# Altium PCB PCB1.PcbDoc
Units mm, origin at the board's own origin, x right, y up, seen from the top; angles counter-clockwise.
Board outline 84 x 84 mm, 2 copper layers (Top Layer, Bottom Layer); 24 components, 1 nets, 129 pads, 0 vias.
Unrouted connection lines stored in the file: 2.
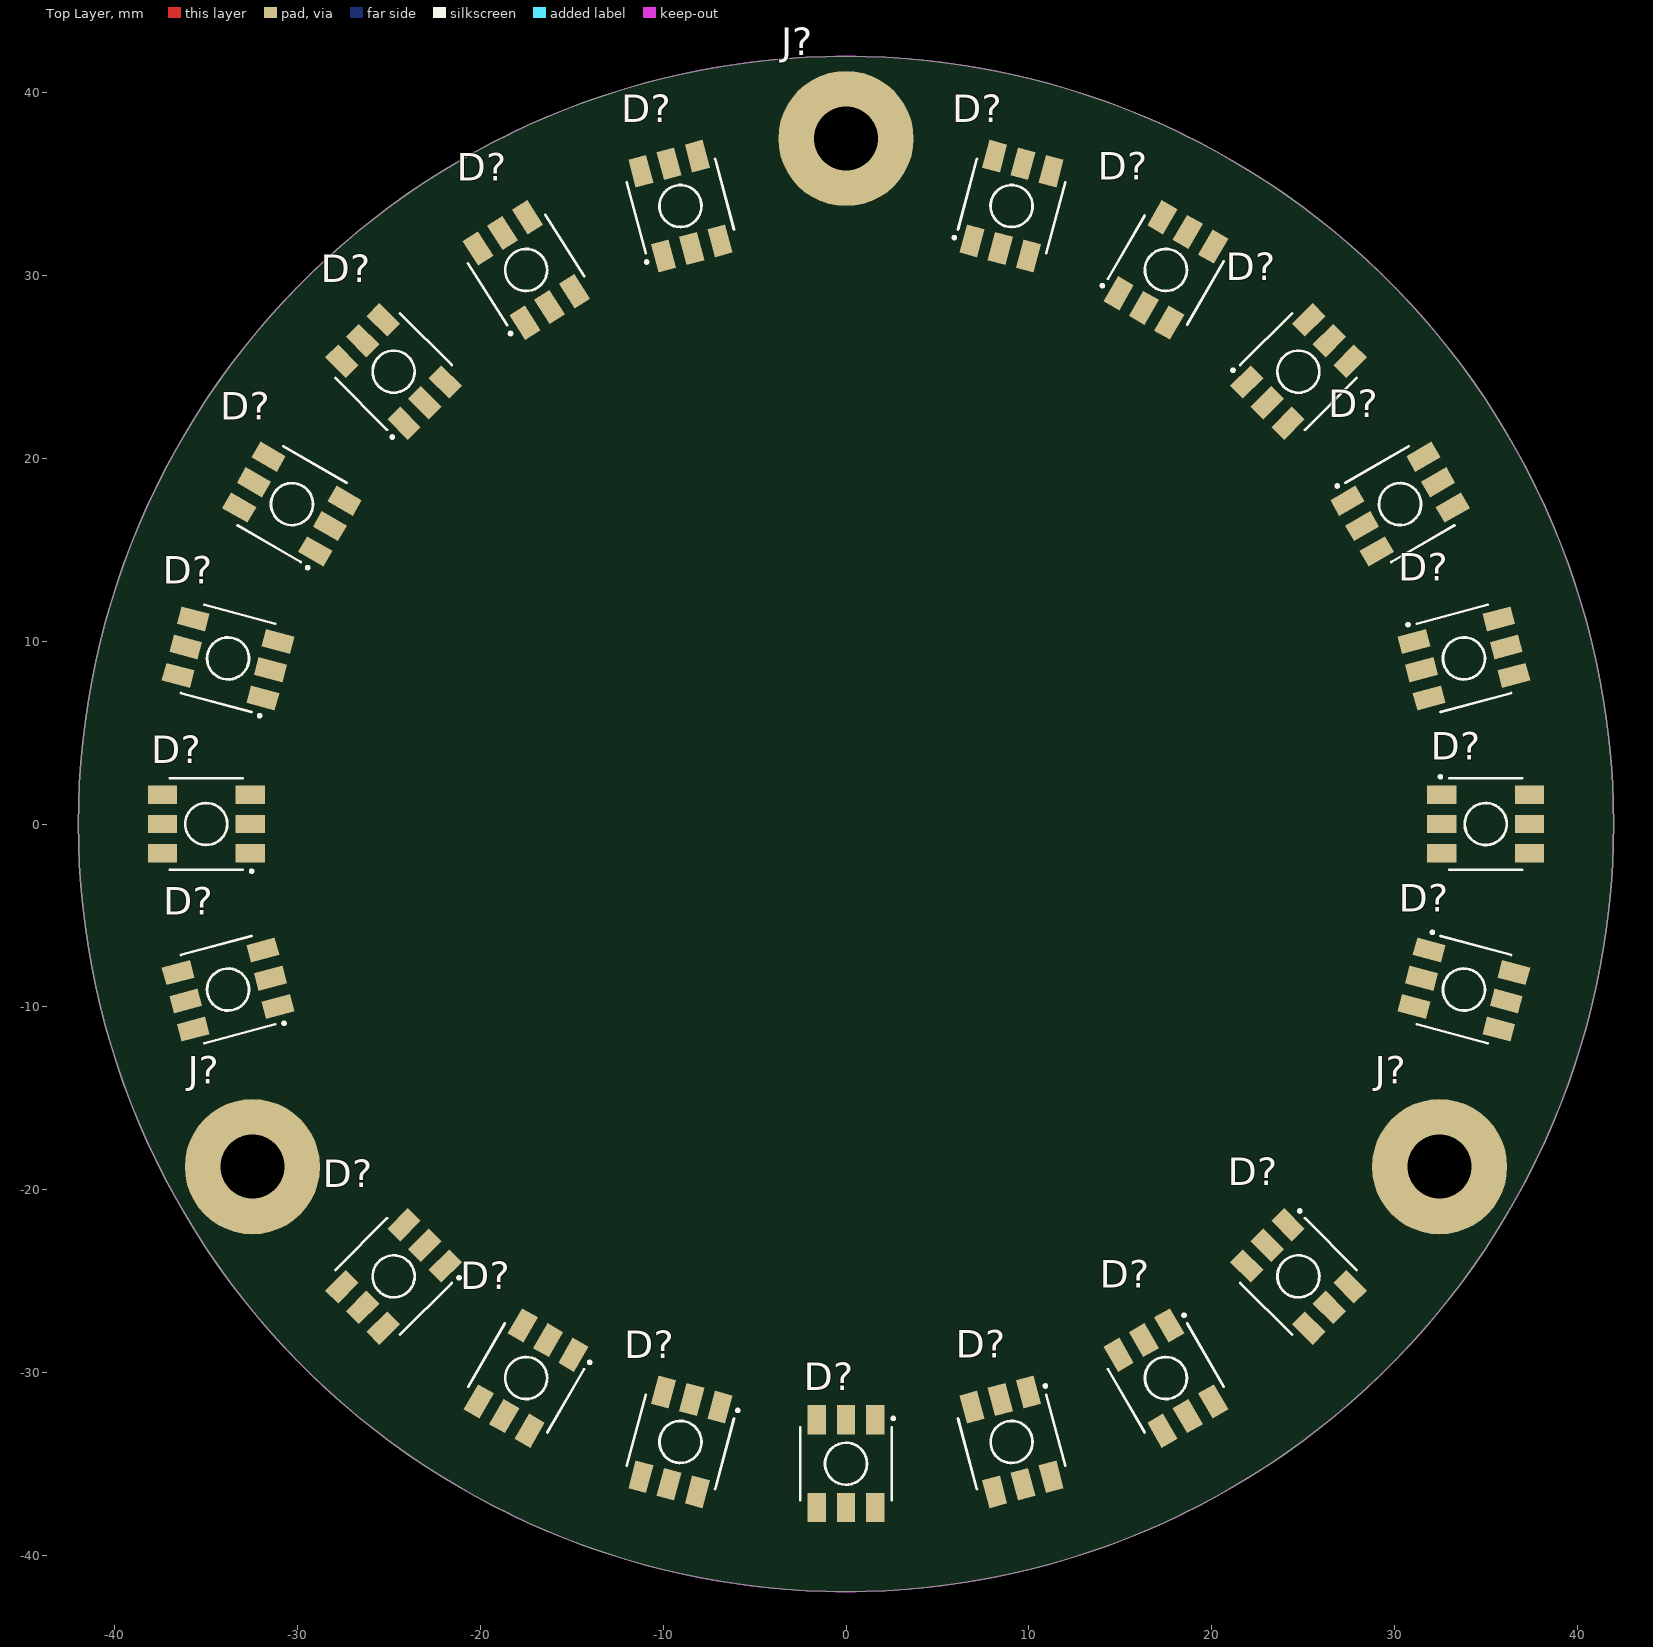
[diagram p0: Top Layer view]
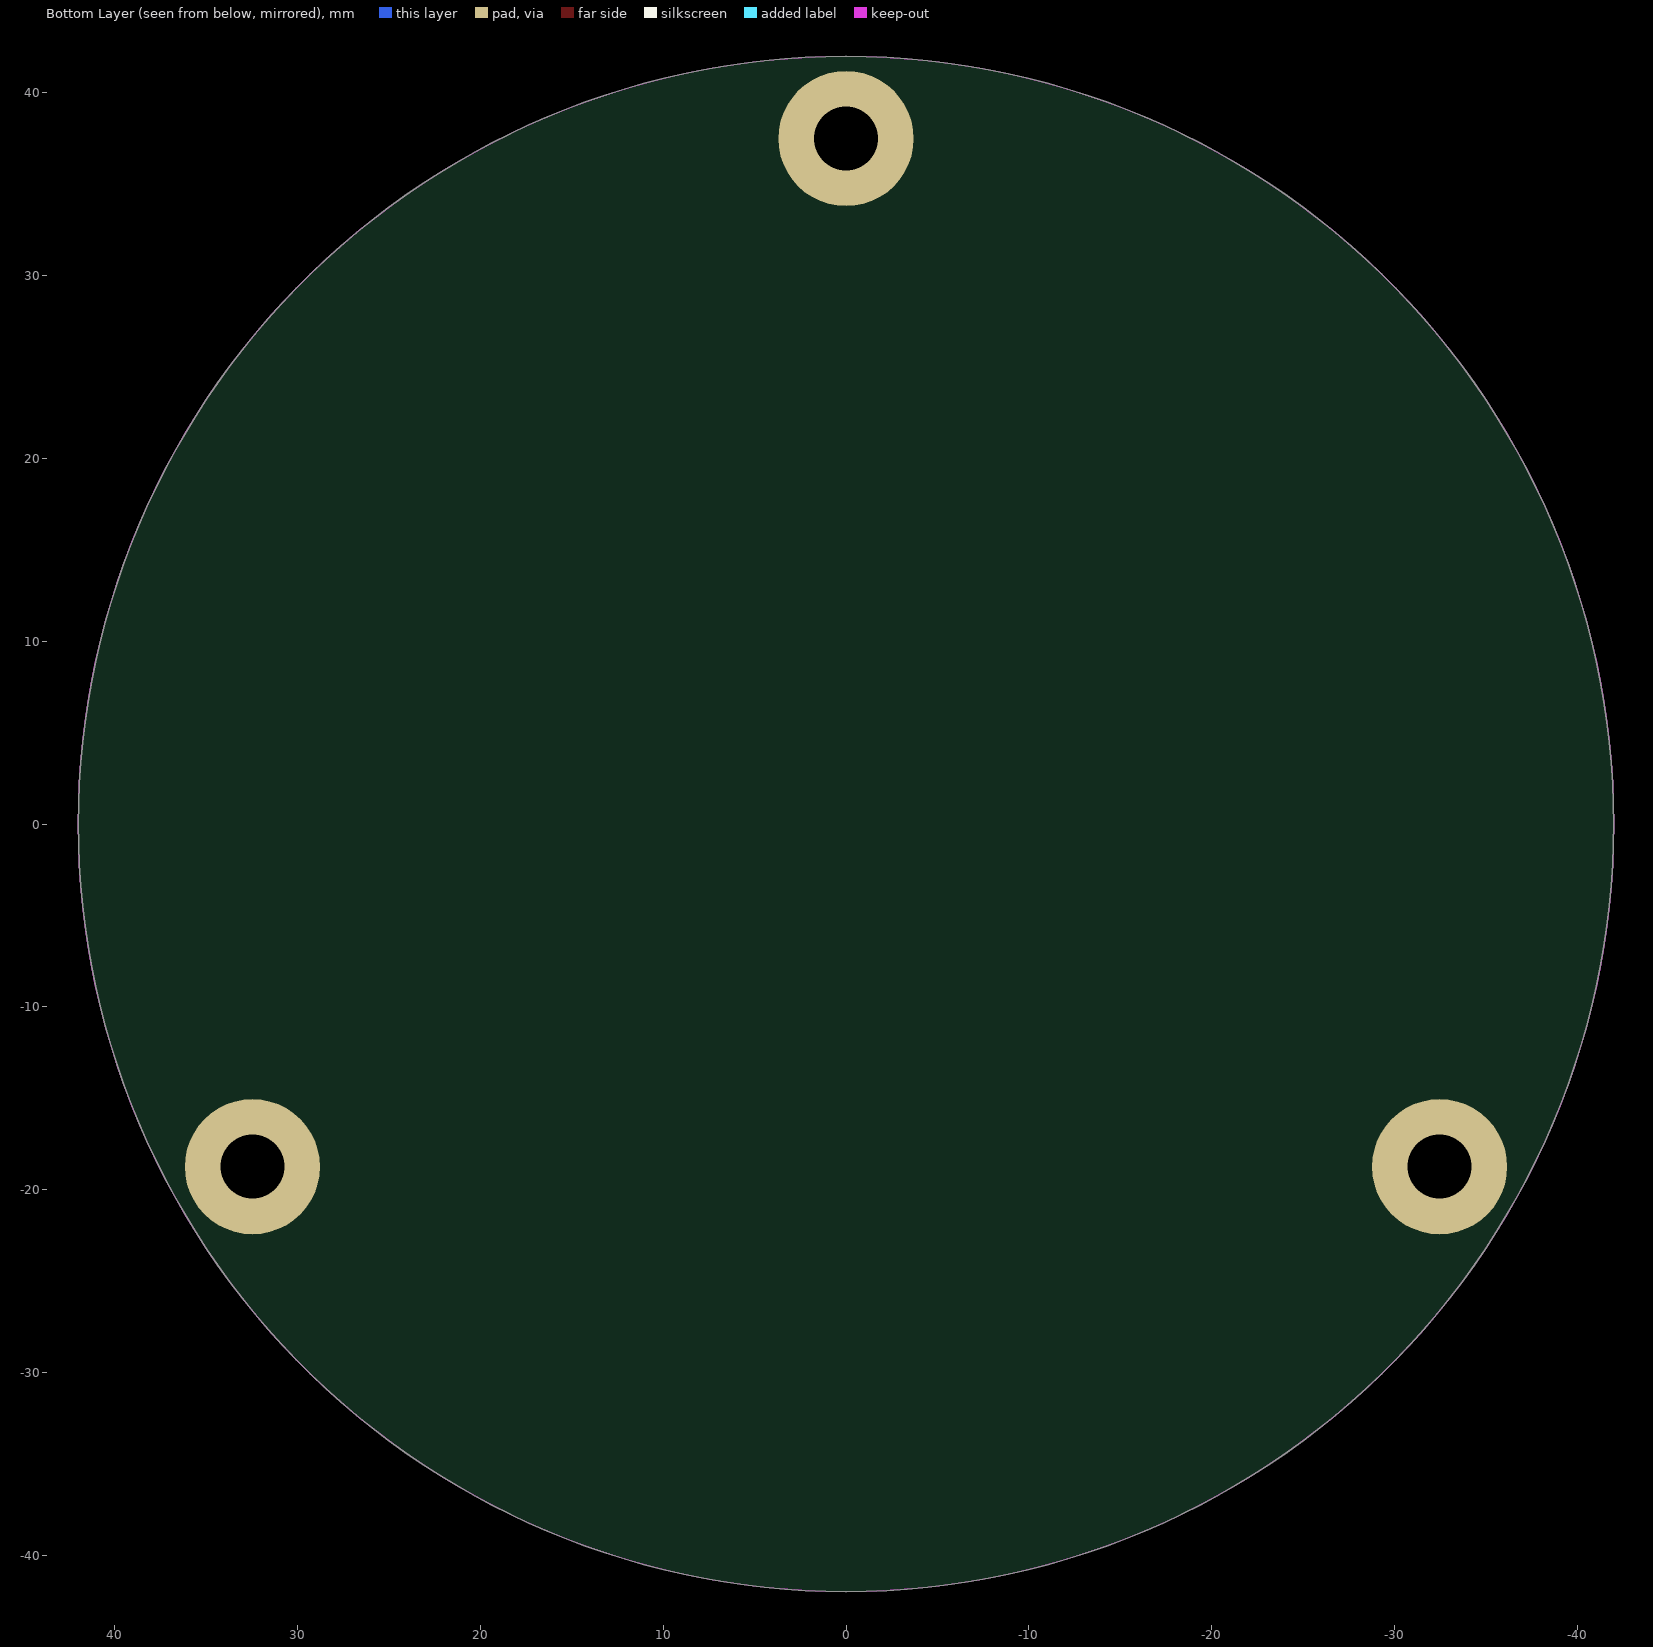
[diagram p1: Bottom Layer view, seen from below]

## Layer stack, top to bottom
Top Solder: solder mask 0.0102, Solder Resist, Dk 3.5
Top Layer: signal copper 0.0356
Dielectric 1: dielectric 0.32, FR-4, Dk 4.8
Bottom Layer: signal copper 0.0356
Bottom Solder: solder mask 0.0102, Solder Resist, Dk 3.5

## Board outline
-42,0 ccw(c0,0) 0,-42 ccw(c0,0) 42,0 ccw(c0,0) 0,42 ccw(c0,0)

## Design rules (kind name [scope] priority, off if disabled: settings)
Clearance [All] p1: gap=0.254 ignorepadtopadclearanceinfootprint=FALSE except(0: Arc-Hole Track-Hole SMDPad-Hole THPad-Hole Via-Hole Fill-Hole Poly-Hole Region-Hole Text-Hole)
PolygonConnect [All] p1: connectstyle=Relief reliefconductorwidth=0.254 reliefentries=4 polygonreliefangle="90 Angle" airgapwidth=0.254
RoutingVias [All] p1: holewidth=0.711 width=1.27 viastyle="Through Hole" minholewidth=0.711 minwidth=1.27 maxholewidth=0.711 maxwidth=1.27
SolderMaskExpansion [All] p1: expansion=0.102 istentingtop=FALSE
Width [All] p1: maxlimit=0.254 minlimit=0.254 preferedwidth=0.254
30 further rules are at their usual default settings.

## Classes and differential pairs
component class Sheet1: D? J?

## Components (designator, comment, footprint, x,y, rotation, side; value= is the part's Value field where it differs from the comment)
D? "MHP5050RGBDT" LED,RGB,SMD,5050 0,-35 r270 top
D? "MHP5050RGBDT" LED,RGB,SMD,5050 -9.059,33.807 r105 top
D? "MHP5050RGBDT" LED,RGB,SMD,5050 -17.5,-30.311 r240 top
D? "MHP5050RGBDT" LED,RGB,SMD,5050 9.059,33.807 r75 top
D? "MHP5050RGBDT" LED,RGB,SMD,5050 9.059,-33.807 r285 top
D? "MHP5050RGBDT" LED,RGB,SMD,5050 17.5,-30.311 r300 top
D? "MHP5050RGBDT" LED,RGB,SMD,5050 30.311,17.5 r30 top
D? "MHP5050RGBDT" LED,RGB,SMD,5050 -9.059,-33.807 r255 top
D? "MHP5050RGBDT" LED,RGB,SMD,5050 24.749,24.749 r45 top
D? "MHP5050RGBDT" LED,RGB,SMD,5050 17.5,30.311 r60 top
D? "MHP5050RGBDT" LED,RGB,SMD,5050 -24.749,24.749 r135 top
D? "MHP5050RGBDT" LED,RGB,SMD,5050 35,0 r0 top
D? "MHP5050RGBDT" LED,RGB,SMD,5050 24.749,-24.749 r315 top
D? "MHP5050RGBDT" LED,RGB,SMD,5050 -24.749,-24.749 r225 top
D? "MHP5050RGBDT" LED,RGB,SMD,5050 -35,0 r180 top
D? "MHP5050RGBDT" LED,RGB,SMD,5050 33.807,-9.059 r345 top
D? "MHP5050RGBDT" LED,RGB,SMD,5050 33.807,9.059 r15 top
D? "MHP5050RGBDT" LED,RGB,SMD,5050 -30.311,17.5 r150 top
D? "MHP5050RGBDT" LED,RGB,SMD,5050 -33.807,9.059 r165 top
D? "MHP5050RGBDT" LED,RGB,SMD,5050 -33.807,-9.059 r195 top
D? "MHP5050RGBDT" LED,RGB,SMD,5050 -17.5,30.311 r122.39 top
J? "Plated M3 hole" HOLE,M3,3mm,PLATED 32.476,-18.75 r0 top
J? "Plated M3 hole" HOLE,M3,3mm,PLATED -32.476,-18.75 r0 top
J? "Plated M3 hole" HOLE,M3,3mm,PLATED 0,37.5 r0 top

## Footprints (in the part's own frame and the unit in brackets; to place one, negate y for a bottom-side part, rotate by r counter-clockwise, add the part's x,y. Pads: shape width x height; smd on the part's side, far side on the other; paste and mask are expansions set on the pad)
HOLE,M3,3mm,PLATED [mm] "Plated M3 Bolt Hole"
  round 7.4 hole 3.5: 0(0,0)
LED,RGB,SMD,5050 [mm] "MeiHua MHP5050RGBDT"
  rect 1.6x1 smd mask+0.05: 1(-2.4,1.6) 2(2.4,1.6) 3(-2.4,0) 4(2.4,0) 5(-2.4,-1.6) 6(2.4,-1.6)
  silkscreen extent -2.56,-2.5 2,2.66, body extent -2.7,-2.5 2.7,2.5, height 1.62

## Part data
D? D? D? D? D? D? D? D? D? D? D? D? D? D? D? D? D? D? D? D? D?: library part LED,Tri-Color,RGB,SMD,5050, "SMD,5x5mm Light Emitting Diodes (LED) RoHS", Manufacturer=MEIHUA, Vendor Part Number=C409780, CreatedBy="Judd Foster", HelpURL=https://datasheet.lcsc.com/szlcsc/1912111437_MEIHUA-MHP5050RGBDT_C409780.pdf, Manufacturer Part Number=MHP5050RGBDT, Vendor=LCSC
J? J? J?: library part Mech,Hole,M3,3mm,Plated, "3.5mm Drill, 7.4mm Pad, PTH", Manufacturer=N/A, CreatedBy="Judd Foster", HelpURL=N/A, Manufacturer Part Number=N/A, Vendor=N/A, Vendor Part Number=N/A

## Nets (pads, with @x,y where several pads share a name; then routed paths per layer and width w, separated by ;. In a path a pad name is that pad's centre, name@x,y a point inside that pad or via, vN(x,y) a via of type N, cw(c..) or ccw(c..) an arc to the next point about the centre after c; other vN are vias at no path point)
GND: J?.0
pads on no net: D?.1 D?.2 D?.3 D?.4 D?.5 D?.6

## Keep-outs
Keep-Out Layer:
  circle w0.025: c0,0 r42